# Altium PCB PCB1.PcbDoc
Units mil, origin at the board's own origin, x right, y up, seen from the top; angles counter-clockwise.
Board outline 4505.03 x 2170.03 mil, 2 copper layers (Top Layer, Bottom Layer); 21 components, 28 nets, 93 pads, 4 vias.
Unrouted connection lines stored in the file: 1.
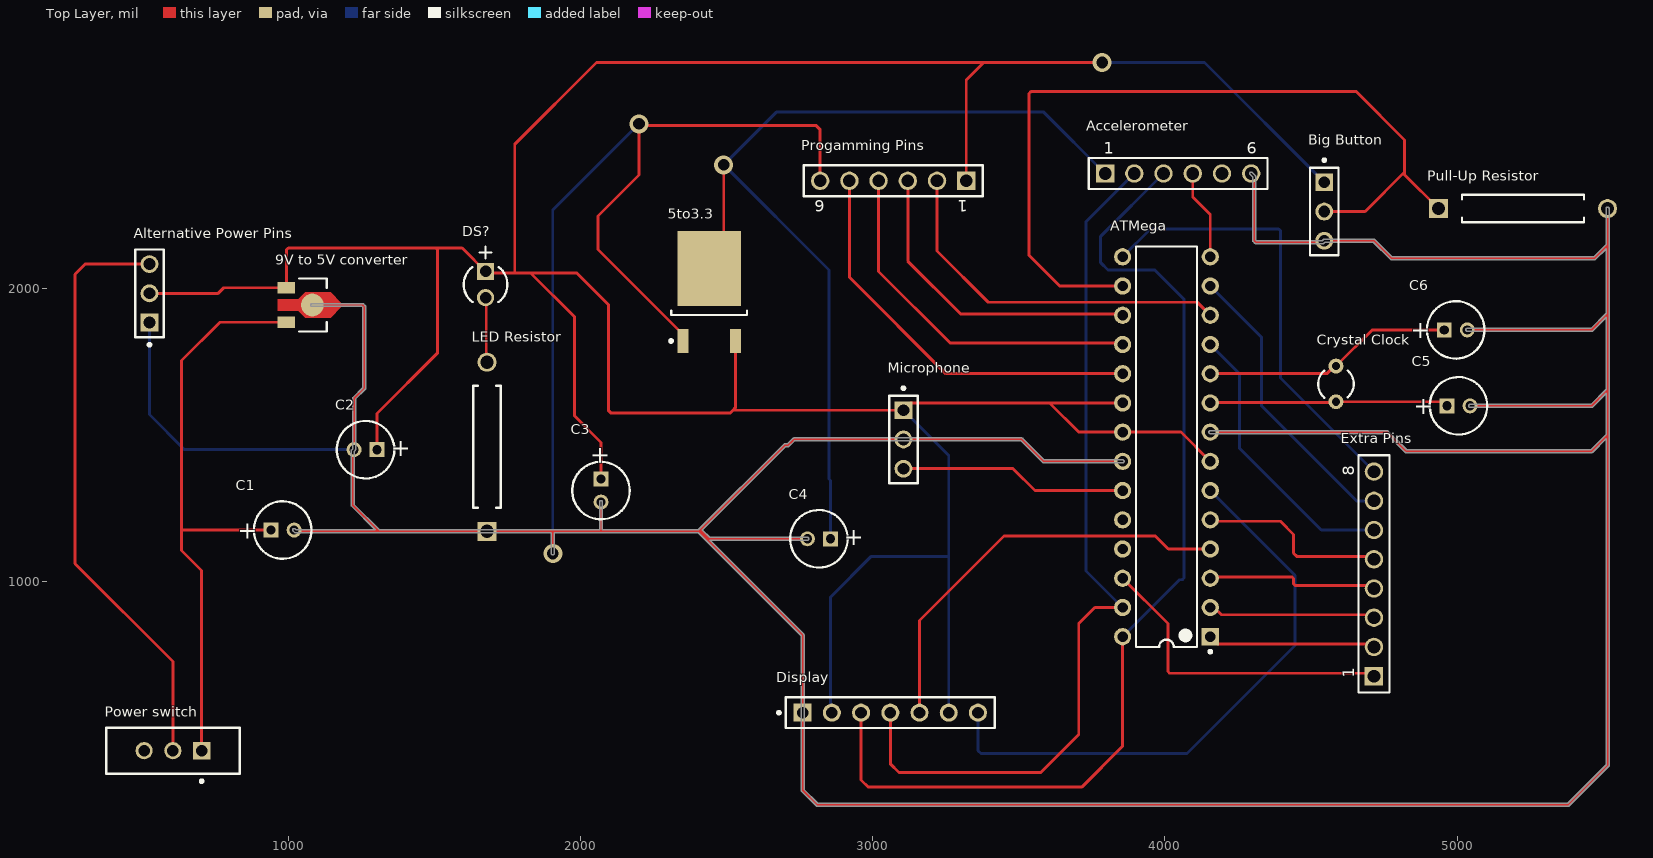
[diagram p0: Top Layer view]
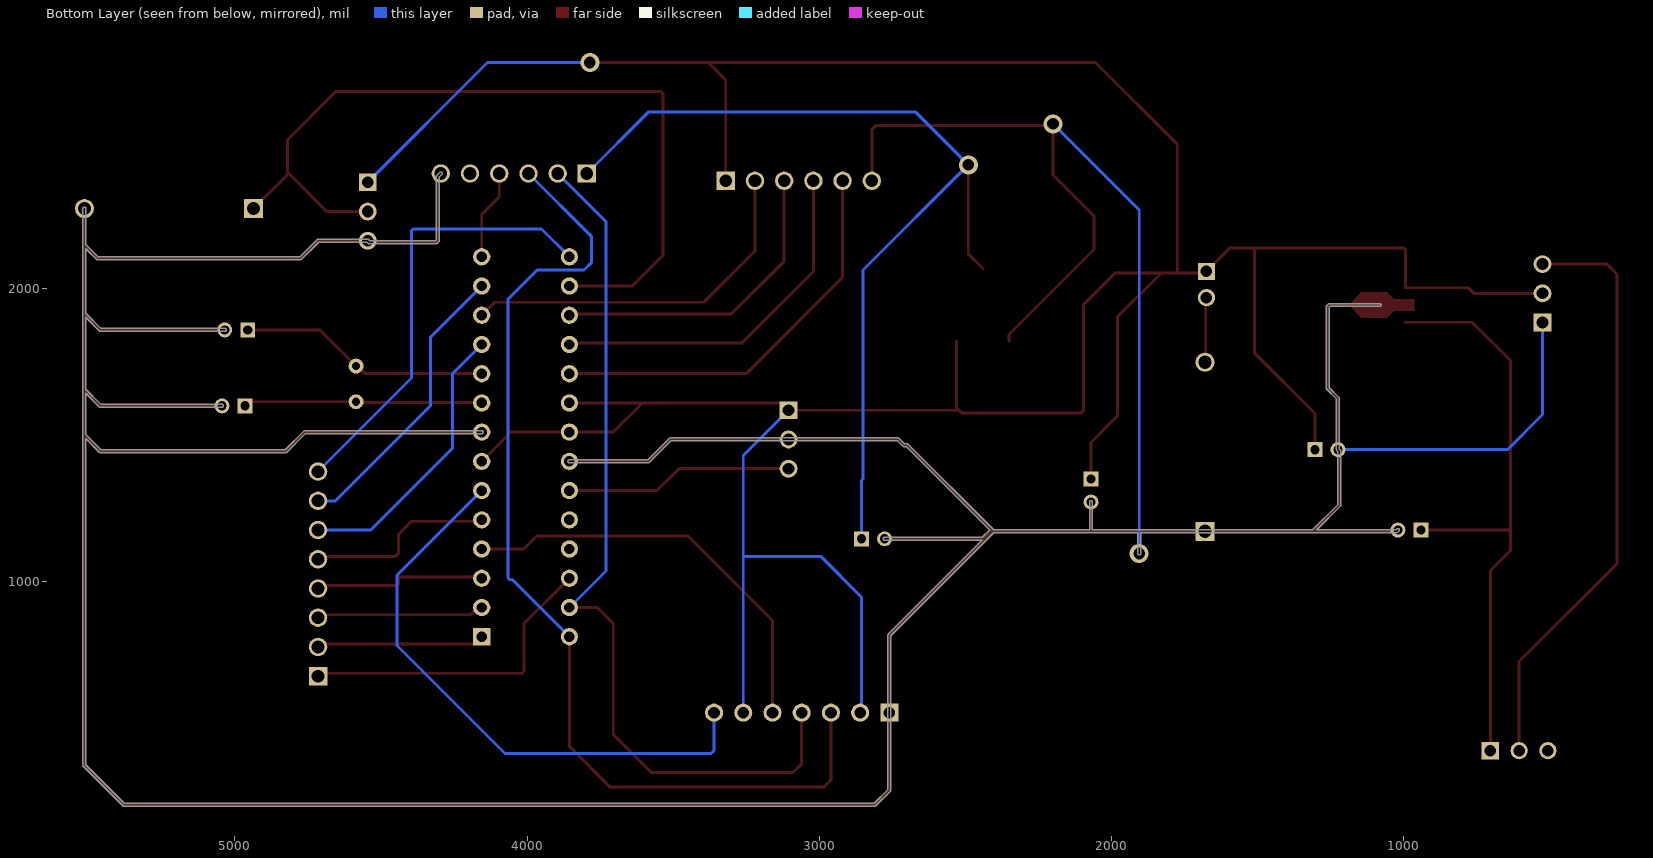
[diagram p1: Bottom Layer view, seen from below]

## Layer stack, top to bottom
Top Solder: solder mask 0.4, Solder Resist, Dk 3.5
Top Layer: signal copper 1.4
Dielectric 1: dielectric 12.6, FR-4, Dk 4.8
Bottom Layer: signal copper 1.4
Bottom Solder: solder mask 0.4, Solder Resist, Dk 3.5

## Board outline
1024.37,1165.61 1899.99,1165.61 1899.99,1095 ccw(c1905,1095) 1910.01,1095 1910.01,1165.61 2402.92,1165.61 2754.99,813.55 2754.99,285 ccw(c2760,285) 2756.47,281.44 2756.45,281.45 2806.45,231.45 2806.44,231.47 ccw(c2810,235) 2810,229.98 5380,229.98 ccw(c5380,235) 5383.56,231.47 5383.55,231.45 5518.55,366.45 5518.53,366.44 ccw(c5515,370) 5520.02,370 5520.02,2274.37 ccw(c5515,2274.37) 5518.53,2277.93 5518.55,2277.92 5517.92,2278.55 ccw(c5514.37,2275) 5509.98,2272.57 5509.98,2152.08 5467.92,2110.01 4777.08,2110.01 4718.55,2168.55 4718.56,2168.53 ccw(c4715,2165) 4715,2170.01 4545,2170.01 ccw(c4545,2165) 4541.44,2168.53 4541.45,2168.55 4537.92,2165.01 4312.94,2165.01 4310.02,2167.94 4310.02,2385 ccw(c4305,2385) 4308.53,2388.56 4308.55,2388.55 4298.55,2398.55 ccw(c4295,2395) 4291.45,2391.45 4299.98,2382.92 4299.98,2165.86 ccw(c4305,2165.86) 4301.47,2162.29 4301.45,2162.31 4307.31,2156.45 4307.29,2156.47 ccw(c4310.86,2160) 4310.86,2154.99 4540,2154.99 ccw(c4540,2160) 4543.56,2156.47 4543.55,2156.45 4547.08,2159.99 4712.92,2159.99 4771.45,2101.45 4771.44,2101.47 ccw(c4775,2105) 4775,2099.99 5470,2099.99 ccw(c5470,2105) 5473.56,2101.47 5473.55,2101.45 5509.98,2137.89 5509.98,1917.08 5457.92,1865.01 5034.37,1865.01 ccw(c5034.37,1860) 5034.37,1854.99 5460,1854.99 ccw(c5460,1860) 5463.56,1856.47 5463.55,1856.45 5509.98,1902.89 5509.98,1657.08 5457.92,1605.01 5043.74,1605.01 ccw(c5043.74,1600) 5043.74,1594.99 5460,1594.99 ccw(c5460,1600) 5463.56,1596.47 5463.55,1596.45 5509.98,1642.89 5509.98,1502.08 5457.92,1450.01 4827.08,1450.01 4763.55,1513.55 4763.56,1513.53 ccw(c4760,1510) 4760,1515.01 4155,1515.01 ccw(c4155,1510) 4155,1504.99 4757.92,1504.99 4821.45,1441.45 4821.44,1441.47 ccw(c4825,1445) 4825,1439.99 5460,1439.99 ccw(c5460,1445) 5463.56,1441.47 5463.55,1441.45 5509.98,1487.89 5509.98,372.08 5377.92,240.02 2812.08,240.02 2765.01,287.08 2765.01,815.63 ccw(c2760,815.63) 2763.53,819.19 2763.55,819.18 2442.74,1139.99 2776.26,1139.99 ccw(c2776.26,1145) 2781.28,1145 ccw(c2776.26,1145) 2776.26,1150.01 2442.08,1150.01 2416.78,1175.31 2701.45,1459.99 2710,1459.99 ccw(c2710,1465) 2713.56,1461.47 2713.55,1461.45 2732.08,1479.99 3507.92,1479.99 3581.45,1406.45 3581.44,1406.47 ccw(c3585,1410) 3585,1404.99 3855,1404.99 ccw(c3855,1410) 3860.02,1410 ccw(c3855,1410) 3855,1415.01 3587.08,1415.01 3513.55,1488.55 3513.56,1488.53 ccw(c3510,1485) 3510,1490.01 2730,1490.01 ccw(c2730,1485) 2726.44,1488.53 2726.45,1488.55 2707.92,1470.01 2699.37,1470.01 ccw(c2699.37,1465) 2695.81,1468.53 2695.82,1468.55 2402.92,1175.64 2075.01,1175.64 2075.01,1270.63 ccw(c2070,1270.63) 2064.99,1270.63 2064.99,1175.64 1312.01,1175.64 1225.01,1262.64 1225.01,1442.92 1228.55,1446.45 1228.53,1446.44 ccw(c1225,1450) 1230.01,1450 1230.01,1622.92 1263.55,1656.45 1263.53,1656.44 ccw(c1260,1660) 1265.01,1660 1265.01,1939.14 ccw(c1260,1939.14) 1263.53,1942.71 1263.55,1942.69 1257.69,1948.55 1257.71,1948.53 ccw(c1254.14,1945) 1254.14,1950.01 1082.27,1950.01 ccw(c1082.27,1945) 1082.27,1939.99 1252.06,1939.99 1254.99,1937.06 1254.99,1662.08 1221.45,1628.55 1221.47,1628.56 ccw(c1225,1625) 1219.99,1625 1219.99,1452.08 1216.45,1448.55 1216.47,1448.56 ccw(c1220,1445) 1214.99,1445 1214.99,1260.56 ccw(c1220,1260.56) 1216.47,1257 1216.45,1257.02 1297.83,1175.64 1026.45,1175.64 1023.55,1178.55 ccw(c1020,1175) 1016.45,1171.45 1020.82,1167.08 1020.81,1167.1 ccw(c1024.37,1170.63)

## Design rules (kind name [scope] priority, off if disabled: settings)
Clearance [All] p1: gap=10 ignorepadtopadclearanceinfootprint=FALSE except(0: Arc-Hole Track-Hole SMDPad-Hole THPad-Hole Via-Hole Fill-Hole Poly-Hole Region-Hole Text-Hole)
PolygonConnect [All] p1: connectstyle=Relief reliefconductorwidth=10 reliefentries=4 polygonreliefangle="90 Angle" airgapwidth=10
RoutingVias [All] p1: holewidth=28 width=50 viastyle="Through Hole" minholewidth=28 minwidth=50 maxholewidth=28 maxwidth=50
SolderMaskExpansion [All] p1: expansion=4 istentingtop=FALSE
Width [All] p1: maxlimit=10 minlimit=10 preferedwidth=10
30 further rules are at their usual default settings.

## Components (designator, comment, footprint, x,y, rotation, side; value= is the part's Value field where it differs from the comment)
5to3.3 "LD1117DT33TR" TO-252_N 2440,1989.29 r90 top
"9V to 5V converter" "UA78L05CPK" FP-PK0003A-MFG 1080,1945 r270 top
Accelerometer "61300611121" 61300611121 4045,2395 r0 top
"Alternative Power Pins" "22-28-4033" MOLX-22-28-4033_V 525,1985 r90 top
ATMega "ATMEGA328P-PU" ATML-28P3 4005,1460 r180 top
"Big Button" "22-28-4033" MOLX-22-28-4033_V 4545,2265 r270 top
C1 "ECA-1HHG010" CAPPR55-200-1100X500X1200 980.63,1175 r0 top value=330nF
C2 "ECA-1HHG010" CAPPR55-200-1100X500X1200 1264.37,1450 r180 top value=100nF
C3 "ECA-1HHG010" CAPPR55-200-1100X500X1200 2070,1310 r270 top value=100nF
C4 "ECA-1HHG010" CAPPR55-200-1100X500X1200 2815.63,1145 r180 top value=10µF
C5 "ECA-1HHG010" CAPPR55-200-1100X500X1200 5004.37,1600 r0 top value=10µF
C6 "ECA-1HHG010" CAPPR55-200-1100X500X1200 4995,1860 r0 top value=10µF
"Crystal Clock" "XTAL" R38 4585,1675 r0 top
Display "TSW-107-07-G-S" FP-TSW-107-07-G-S-MFG 3060,550 r0 top
DS? "304090040" LED-2P-2.28-3MM 1675,2015.12 r270 top
"Extra Pins" "61300811121" 61300811121 4715,1025 r90 top
"LED Resistor" "12FR050E" RESA86-1060X240 1680,1460 r90 top value=50m
Microphone "22-28-4033" MOLX-22-28-4033_V 3105,1485 r270 top
"Power switch" "EG1218" ESWI-EG1218_V 605,420 r180 top
"Progamming Pins" "61300611121" 61300611121 3070,2370 r180 top
"Pull-Up Resistor" "12FR050E" RESA86-1060X240 5225,2275 r0 top value=50m

## Footprints (in the part's own frame and the unit in brackets; to place one, negate y for a bottom-side part, rotate by r counter-clockwise, add the part's x,y. Pads: shape width x height; smd on the part's side, far side on the other; paste and mask are expansions set on the pad)
61300611121 [mm] "Pin Header, pitch 2.54 mm, THT, Vertical, single row, 6p"
  rect 1.6x1.6 hole 1.1: 1(-6.35,0)
  round 1.6 hole 1.1: 2(-3.81,0) 3(-1.27,0) 4(1.27,0) 5(3.81,0) 6(6.35,0)
  silkscreen extent -7.77,-1.35 7.77,1.35, body extent -7.62,-1.27 7.62,1.27, height 8.57
61300811121 [mm] "Pin Header, pitch 2.54 mm, THT, Vertical, single row, 8p"
  rect 1.6x1.6 hole 1.1: 1(-8.89,0)
  round 1.6 hole 1.1: 2(-6.35,0) 3(-3.81,0) 4(-1.27,0) 5(1.27,0) 6(3.81,0) 7(6.35,0) 8(8.89,0)
  silkscreen extent -10.31,-1.35 10.31,1.35, body extent -10.16,-1.27 10.16,1.27, height 8.57
ATML-28P3 [mm] "DIP, 28-Leads, Body 34.8x7.2mm, Pitch 2.54mm"
  rect 1.5x1.5 hole 0.9: 1(-3.81,16.51)
  round 1.5 hole 0.9: 2(-3.81,13.97) 3(-3.81,11.43) 4(-3.81,8.89) 5(-3.81,6.35) 6(-3.81,3.81) 7(-3.81,1.27) 8(-3.81,-1.27) 9(-3.81,-3.81) 10(-3.81,-6.35) 11(-3.81,-8.89) 12(-3.81,-11.43) 13(-3.81,-13.97) 14(-3.81,-16.51) 15(3.81,-16.51) 16(3.81,-13.97) 17(3.81,-11.43) 18(3.81,-8.89) 19(3.81,-6.35) 20(3.81,-3.81) 21(3.81,-1.27) 22(3.81,1.27) 23(3.81,3.81) 24(3.81,6.35) 25(3.81,8.89) 26(3.81,11.43) 27(3.81,13.97) 28(3.81,16.51)
  silkscreen extent -3.94,-17.4 2.65,17.93, body extent -3.95,-17.4 3.95,17.4, height 4.58
CAPPR55-200-1100X500X1200 [mm] "THD, 2-Leads, Dia 5mm, Pin Spacing 2mm"
  rect 1.3x1.3 hole 0.8: 1(-1,0)
  round 1.3 hole 0.8: 2(1,0)
  silkscreen extent -2.5,-2.5 2.5,2.5, body extent -2.5,-2.5 2.45,2.5, height 12
ESWI-EG1218_V [mm] "THD, 3-Leads, Body 11.6x4mm, Pitch 2.5mm"
  rect 1.5x1.5 hole 1: 1(-2.5,0)
  round 1.5 hole 1: 2(0,0) 3(2.5,0)
  silkscreen extent -5.8,-2 5.8,2.77, body extent -5.8,-2 5.8,2, height 7.4
FP-PK0003A-MFG [mm]
  rect 1x1.5 smd paste+0 mask+0: 1(-1.5,-2.203) 3(1.5,-2.203)
  round 1.98 smd paste+0 mask+0: 2(0,0.058)
  Top Layer region: 0,-2.953 -0.5,-2.953 -0.5,-1.152 -1.1,-0.553 -1.1,1.647 -0.2,2.548 0.2,2.548 1.1,1.647 1.1,-0.553 0.5,-1.152 0.5,-2.953
  silkscreen extent -2.3,-1.08 2.3,1.3, body extent -2.55,-3.05 2.55,2.65, height 0.25
FP-TSW-107-07-G-S-MFG [mm]
  rect 1.57x1.57 hole 1.02 paste-1000 mask+0: 1(-7.62,0)
  round 1.57 hole 1.02 paste-1000 mask+0: 2(-5.08,0) 3(-2.54,0) 4(0,0) 5(2.54,0) 6(5.08,0) 7(7.62,0)
  silkscreen extent -9.8,-1.34 9.08,1.34, body extent -9.18,-1.44 9.18,1.44, height 0.25
LED-2P-2.28-3MM [mm] "LED, 2-Leads, Dia 3mm, Pitch 2.28mm"
  rect 1.5x1.5 hole 1: 1(-1.14,0)
  round 1.5 hole 1: 2(1.14,0)
  silkscreen extent -3.29,-1.9 1.52,1.9, body extent -1.9,-1.91 1.52,1.91, height 5.3
MOLX-22-28-4033_V [mm] "THD, 3-Leads, Body 7.62x2.49mm, Pitch 2.54mm"
  rect 1.55x1.55 hole 1.02: 1(-2.54,0)
  round 1.55 hole 1.02: 2(0,0) 3(2.54,0)
  silkscreen extent -4.58,-1.24 3.81,1.24, body extent -3.81,-1.24 3.81,1.24, height 8.38
R38 [mm] "Crystal, Thru-Hole; 2 Leads; Body 3.1 x 8.2 mm (Dia.xH)"
  round 1.3 hole 0.7: 1(0,1.55) 2(0,-1.55)
  silkscreen extent -1.55,-1.19 1.55,1.17
RESA86-1060X240 [mm] "Axial Resistor, 2-Leads, Dia 2.4mm, Body Length 10.6mm"
  rect 1.65x1.65 hole 1.15: 1(-7.35,0)
  round 1.65 hole 1.15: 2(7.35,0)
  silkscreen extent -5.3,-1.2 5.3,1.2, body extent -7.76,-1.19 7.76,1.2, height 2.4
TO-252_N [mm] "D-PAK, 4-Leads, Body 6.1x6.5mm, Pitch 2.28mm, Lead Span 9.7mm, IPC Medium Density"
  rect 2.1x0.95 smd: 1(-4.25,2.28) 3(-4.25,-2.28)
  rect 6.5x5.5 smd: 4(2.05,0)
  silkscreen extent -4.37,-3.3 -1.6,3.43, body extent -2,-3.3 4.2,3.3, height 2.4

## Part data
5to3.3: library part CMP-0244-00088-1, "Fixed Low Drop Positive Voltage Regulator, 3.3V, 3-Pin DPAK, Tape and Reel", ComponentLink1Description="Manufacturer URL", ComponentLink1URL=http://www.st.com, ComponentLink2Description=Datasheet, ComponentLink2URL=http://www.st.com/internet/com/TECHNICAL_RESOURCES/TECHNICAL_LITERATURE/DATASHEET/CD00000544.pdf, DatasheetVersion=1/11/2011, PackageDescription="3-Pin Transistor Outline Package 2.28 mm Pitch, 9.7 mm Lead Span (DPAK)", PackageReference=TO-252, PackageVersion=2011
"9V to 5V converter": library part CMP-2000-07341-2, "IC REG LINEAR 5V 100MA SOT89-3", Dropout Voltage=1.7V, Manufacturer="Texas Instruments", Max Junction Temp=+125°C, Max Supply Voltage=20V, Min Supply Voltage=7V, Nominal Supply Current=3.8mA, Output Current=100mA, Output Voltage=5V, Package=PK0003A, Temperature="0°C to +125°C", Temperature Range Low=0°C, Accuracy Percentage=3.75%, Automotive=No, Category=IC, ComponentLink2Description=Datasheet, ComponentLink2URL=https://www.ti.com/lit/ds/symlink/ua78l.pdf, Device Class L1="Integrated Circuits (ICs)", Device Class L2="Power Management ICs", Device Class L3="Voltage Regulators - Linear", Digikey Description="IC REG LINEAR 5V 100MA SOT89-3", Height=1.6mm, Lead Free=Yes, Manufacturer Part Number=UA78L05CPK, Mouser Description="100-mA, 30-V VIN, Positive-Voltage Linear Regulators 3-SOT-89 0 to 125", Number Of Outputs=1, Octopart=https://octopart.com/ua78l05cpk-texas+instruments-525289, Output Type=Fixed, RoHS=TRUE, Temperature Range High=+125°C
Accelerometer "Progamming Pins": library part CMP-1502-01070-1, "THT Vertical Pin Header WR-PHD, Pitch 2.54 mm, Single Row, 6 pins", Contact Resistance=20mOhm, Manufacturer="Wurth Elektronik", Operating Temperature=-40to105degC, Rated Current=3A, Withstanding Voltage=500VAC, Working Voltage=250VAC, Datasheet URL=https://katalog.we-online.de/em/datasheet/6130xx11121.pdf, Gender=Male, Manufacturer URL=http://www.we-online.de, Mounting Technology=THT, Orientation=Vertical, Package Reference=61300611121, Packaging=Bag, Part Number=61300611121, Pin Number=6, Pitch=2.54mm, Publisher=WurthElektronik, Row Number=Single
"Alternative Power Pins" "Big Button" Microphone: library part CMP-1676-00001-5, "Male Header, Pitch 2.54 mm, 1 x 3 Position, Height 8.38 mm, Tail Length 3.18 mm, RoHS, Bulk", Colour=Black, Current Rating="4 A", Manufacturer=Molex, Max Operating Temperature="75 degC", Min Operating Temperature="0 degC", Package Quantity=1, Voltage Rating="250 V", ComponentLink1Description="Manufacturer URL", ComponentLink1URL=http://www.molex.com/, ComponentLink2Description=Datasheet, ComponentLink2URL=http://www.molex.com/pdm_docs/sd/022284033_sd.pdf, Contact Finish=Gold, Contact Material=Brass, Contact Plating=Gold, DatasheetVersion="Rev. G, 01/2012", Height="8.38 mm", Lead Pitch="0.1 inch", Length="7.62 mm", Mount="Through Hole", Mounting Technology="Through Hole", PackageDescription="Male Header, Pitch 2.54 mm, 1 x 3 Position, Height 8.38 mm, Tail Length 3.18 mm", PackageReference=22-28-4033, Packaging=Bulk, Pins=3, REACH SVHC=Unknown, RoHSCompliant=true, Rows=1
ATMega: library part CMP-020-00004-2, "8-Bit Microcontroller with 32 KBytes In-System Programmable Flash, 23 I/Os, -40 to 85 degC, 28-Pin PDIP (28P3), RoHS, Tube", Case/Package=DIP, Manufacturer=Atmel, Max Clock Frequency=20MHz, Max Operating Temperature=85°C, Max Supply Voltage=5.5V, Min Operating Temperature=-40°C, Min Supply Voltage=1.8V, Package Description="28-Pin Plastic Dual Inline Package, Body 34.671 x 7.3025 mm, Pitch 2.54 mm", Package Quantity=14, Package Reference=28P3, Package Version="Rev. B, 09/2001", Datasheet URL=http://www.atmel.com/images/Atmel-8271-8-bit-AVR-Microcontroller-ATmega48A-48PA-88A-88PA-168A-168PA-328-328P_datasheet_Complete.pdf, Datasheet Version="Rev. 8271J, 11/2015", Density=32KB, Ethernet Channels=0, I/Os=23, Interface=USART, Manufacturer URL=http://www.atmel.com/, Mounting Technology=TH, Package URL=http://www.atmel.com/images/Atmel-8271-8-bit-AVR-Microcontroller-ATmega48A-48PA-88A-88PA-168A-168PA-328-328P_datasheet_Complete.pdf, Packaging=Rail/Tube, Pins=28, RAM Size=2KB, RoHS Compliant=True
C1 C2 C3 C4 C5 C6: library part CMP-001-00024-5, "Aluminum Electrolytic Capacitor, 1 uF, +/- 20%, 50 V, -55 to 105 degC, 2-Pin THD, RoHS, Bulk", Capacitor Type=Electrolytic, Case/Package=Radial, Manufacturer=Panasonic, Max Operating Temperature=105°C, Min Operating Temperature=-55°C, Package Description="2-Pin Radial Lead, Dia 5 mm, Height 12 mm", Package Quantity=200, Package Reference=CAPPR55-200-1100X500X1200, Ripple Current=10mA, Tolerance=20%, Voltage Rating=50V, Datasheet URL=https://datasheet.ciiva.com/7275/94060-7275472.pdf, Datasheet Version=Mar-05, Diameter=5mm, Lead Pitch=2mm, Manufacturer URL=http://www.panasonic.com/, Mounting Technology=TH, Packaging=Bulk, Pins=2, Ripple Current (AC)=10mA, RoHS Compliant=True
"Crystal Clock": "Crystal Oscillator", LatestRevisionDate=17-Jul-2002, LatestRevisionNote="Re-released for DXP Platform.", PackageDescription="Crystal, Thru-Hole; 2 Leads; Body 3.1 x 8.2 mm (Dia.xH)", PackageReference=R38, Published=8-Jun-2000, Publisher="Altium Limited"
Display: library part CMP-02766-000065-1, "CONN HEADER VERT 7POS 2.54MM", Manufacturer=SAMTEC, Package=0, Temperature="-55°C to +125°C", Temperature Range High=+125°C, Temperature Range Low=-55°C, Automotive=No, Category=Conn, ComponentLink2Description=Datasheet, ComponentLink2URL=http://suddendocs.samtec.com/prints/tsw-xxx-xx-xxx-x-xx-xxx-mkt.pdf, Conn Gender=Male, Conn Orientation=Straight, Contact Material=Gold,Nickel, Device Class L1=Connectors, Device Class L2="Headers and Wire Housings", Device Class L3=unset, Digikey Description="CONN HEADER VERT 7POS 2.54MM", Footprint Url=http://suddendocs.samtec.com/prints/tsw-xxx-xx-x-x-xx-xxx-footprint.pdf, Height=8.71mm, Lead Free=Yes, Manufacturer Part Number=TSW-107-07-G-S, Mouser Description="Conn Unshrouded Header HDR 7 POS 2.54mm Solder ST Thru-Hole Automotive Bulk", Number Of Contacts=7, Number Of Rows=1, Octopart=https://octopart.com/tsw-107-07-g-s-samtec-272202, Pitch=2.54mm, RoHS=TRUE
DS?: library part CMP-007-00006-1, "Green LED, 80 mW, 20 mA, -25 to 85 degC, 2-Pin THD", Manufacturer="Shenzhen CGX", Package Description="2-Pin Through Hole Device, Dia 3 mm, Pitch 2.28 mm", Case/Package=304090040, Datasheet URL=http://datasheet.octopart.com/304090040-Chengguangxing-datasheet-62330655.pdf, Datasheet Version="Rev. 1.0, 09/2014", Manufacturer URL=http://szcgx.com/, Mounting Technology=TH, Package Reference=304090040, RoHS Compliant=Unknown
"Extra Pins": library part CMP-1502-01076-1, "THT Vertical Pin Header WR-PHD, Pitch 2.54 mm, Single Row, 8 pins", Contact Resistance=20mOhm, Manufacturer="Wurth Elektronik", Operating Temperature=-40to105degC, Rated Current=3A, Withstanding Voltage=500VAC, Working Voltage=250VAC, Datasheet URL=https://katalog.we-online.de/em/datasheet/6130xx11121.pdf, Gender=Male, Manufacturer URL=http://www.we-online.de, Mounting Technology=THT, Orientation=Vertical, Package Reference=61300811121, Packaging=Bag, Part Number=61300811121, Pin Number=8, Pitch=2.54mm, Publisher=WurthElektronik, Row Number=Single
"LED Resistor" "Pull-Up Resistor": library part CMP-009-00035-3, "Axial Resistor, 50 mOhm, +/- 1%, 2 W, -55 to 275 degC, 2-Pin THD, RoHS, Bulk", Case/Package=Axial, Manufacturer=Ohmite, Max Operating Temperature=275°C, Min Operating Temperature=-55°C, Package Description="2-Pin Axial Lead, Dia 2.4 mm, Body Length 10.6 mm", Package Quantity=10, Power=2W, Tolerance=1%, Voltage Rating=100mV, Composition=Wirewound, Datasheet URL=http://www.ohmite.com/cat/res_10.pdf, Datasheet Version=Jun-15, Diameter=2.4mm, Manufacturer URL=http://www.ohmite.com/, Mounting Technology=TH, Package Reference=12FR050E, Packaging=Bulk, Pins=2, RoHS Compliant=True
"Power switch": library part CMP-1696-00002-1, "Slide Switch, 500 V, -20 to 70 degC, 3-Pin THD, RoHS", Case\Package=SOT-23-5, Dropout Voltage="300 mV", Max Input Voltage="8 V", Max Operating Temperature="85 degC", Max Ouput Current="150 mA", Max Power Dissipation="250 mW", Min Input Voltage="4.3 V", Min Operating Temperature="-40 degC", Nominal Output Voltage="3.3 V", Package Quantity=3000, ComponentLink1Description="Manufacturer URL", ComponentLink1URL=http://www.e-switch.ch/en/, ComponentLink2Description=Datasheet, ComponentLink2URL=https://www.e-switch.com/system/asset/product_line/data_sheet/119/EG.pdf, DatasheetVersion=Oct-15, Height="1.3 mm", Length="3 mm", Mount="Surface Mount", Output Current="150 mA", Output Voltage="3.3 V", Outputs=1, PackageDescription="3-Pin Through Hole Device, Body 11.6 x 4 mm, Pitch 2.5 mm", PackageReference=EG1218, Packaging="Tape and Reel", Pins=5, Power Rating="250 mW", Radiation Hardening=No, REACH SVHC="No SVHC", RoHSCompliant=true, Width="1.8 mm"

## Via types
v1: diameter 65, hole 40, Top Layer to Bottom Layer, 4 vias

## Nets (pads, with @x,y where several pads share a name; then routed paths per layer and width w, separated by ;. In a path a pad name is that pad's centre, name@x,y a point inside that pad or via, vN(x,y) a via of type N, cw(c..) or ccw(c..) an arc to the next point about the centre after c; other vN are vias at no path point)
"3.3 Volt VDD": 5to3.3.4 Accelerometer.1 C4.1 | length 3273.4
  Top Layer w10: 5to3.3.4 2490,2120 v1(2490,2425)
  Bottom Layer w10: C4.1 2855,1345 2850,1350 2850,2065 v1(2490,2425) 2670,2605 3585,2605 Accelerometer.1
"5 Volt VDD": 5to3.3.3 "9V to 5V converter.1" "Alternative Power Pins.2" "Big Button.1" "Progamming Pins.1" ATMega.7 ATMega.20 ATMega.21 C2.1 C3.1 Display.2 Display.6 DS?.1 Microphone.1 | length 12271.6
  Top Layer w10: 525,1985 760,1985 779.06,2004.06 993.29,2004.06 993.29,2133.29 1000,2140 1505,2140 ; C2.1 1303.74,1573.74 1510,1780 1510,2135 1505,2140 ; C3.1 2070,1475 1980,1565 1980,1904.14 1829.14,2055 ; 5to3.3.3 2529.76,1593.25 2521.51,1585 ; 3320,2370 3320,2715 3380,2775 ; v1(3785,2775) 3380,2775 ; ATMega.20 3605,1610 ; ATMega.7 4055,1510 ATMega.21 3705,1510 3605,1610 ; 1505,2140 1595,2140 1680,2055 1775,2055 ; 1775,2055 1829.14,2055 ; 1775,2055 1775,2495 2055,2775 3380,2775 ; 1829.14,2055 1987.07,2055 2095,1947.07 2095,1585 2105,1575 2511.51,1575 2521.51,1585 ; 2521.51,1585 Microphone.1 3130,1610 3605,1610
  Bottom Layer w10: Display.2 2855,555 2855,945 2995,1085 3260,1085 ; Microphone.1 3260,1430 3260,1085 ; Display.6 3260,1085 ; v1(3785,2775) 4135,2775 4545,2365
GND: 5to3.3.1 "9V to 5V converter.2" "Alternative Power Pins.1" "Big Button.3" "LED Resistor.1" "Progamming Pins.6" "Pull-Up Resistor.2" Accelerometer.6 ATMega.8 ATMega.22 C1.2 C2.2 C3.2 C4.2 C5.2 C6.2 Display.1 Microphone.2 | length 18604.8
  Top Layer w10: C1.2 1024.37,1170.63 1309.93,1170.63 ; 1082.27,1945 1254.14,1945 1260,1939.14 1260,1660 1225,1625 C2.2 1220,1445 1220,1260.56 1309.93,1170.63 ; v1(1905,1095) 1905,1170.63 ; C3.2 2070,1170.63 ; 5to3.3.1 2350.24,1844.61 2060,2134.84 2060,2250 2200,2390 v1(2200,2565) 2205,2560 2805,2560 2820,2545 2820,2370 ; C4.2 2440,1145 2409.68,1175.31 ; ATMega.22 3585,1410 3510,1485 Microphone.2 2730,1485 2710,1465 2699.37,1465 2409.68,1175.31 ; ATMega.8 4760,1510 4825,1445 5460,1445 5515,1500 ; Accelerometer.6 4305,2385 4305,2165.86 4310.86,2160 4540,2160 4545,2165 4715,2165 4775,2105 5470,2105 5515,2150 ; C6.2 5460,1860 5515,1915 ; C5.2 5460,1600 5515,1655 ; 5514.37,2275 5515,2274.37 5515,2150 ; 1309.93,1170.63 1680,1170.63 1905,1170.63 ; 1905,1170.63 2070,1170.63 ; 2070,1170.63 2405,1170.63 ; 2405,1170.63 2760,815.63 Display.1 2760,285 2810,235 5380,235 5515,370 5515,1500 ; 2405,1170.63 2409.68,1175.31 ; 5515,1500 5515,1655 ; 5515,1655 5515,1915 ; 5515,1915 5515,2150
  Bottom Layer w10: 525,1885 525,1570 645,1450 C2.2 ; v1(1905,1095) 1905,2270 v1(2200,2565)
"Net9V Battery_P": "Alternative Power Pins.3" "Power switch.2" | length 2045.3
  Top Layer w10: 525,2085 305,2085 270,2050 270,1060 605,725 605,420
  Bottom Layer w10: 520,2090 525,2085
"Net9V to 5V converter_3": "9V to 5V converter.3" "Power switch.1" C1.1 | length 2084.2
  Top Layer w10: 703.43,420 703.43,1036.57 635,1105 635,1180 ; C1.1 640,1175 635,1180 ; 993.29,1885.94 765.94,1885.94 635,1755 635,1180
NetATMega_26: "Extra Pins.1" ATMega.26 | length 1070.8
  Top Layer w10: ATMega.26 4010,855 4010,690.86 4015.86,685 4695,685
NetDS?_2: "LED Resistor.2" DS?.2 | length 222.9
  Top Layer w10: DS?.2 1677.5,1967.74 1677.5,1751.87 1680,1749.37
PB0: Accelerometer.4 ATMega.14 | length 309.9
  Top Layer w10: Accelerometer.4 4095,2315 4155,2255 ATMega.14
PB1: "Extra Pins.8" ATMega.15 | length 1538.5
  Bottom Layer w10: ATMega.15 3950,2205 4389.14,2205 4395,2199.14 4395,1695 4715,1375
PB2: "Big Button.2" "Pull-Up Resistor.1" ATMega.16 | length 2882.2
  Top Layer w10: ATMega.16 3640,2010 3535,2115 3535,2669.14 3540.86,2675 4655,2675 4820,2510 4820,2400 ; 4550,2265 4685,2265 4820,2400 ; 4935.63,2275 4820,2390.63 4820,2400
PB3: "Progamming Pins.3" ATMega.17 | length 1086.6
  Top Layer w10: 3120,2370 3120,2095 3300,1915 3850,1915 ATMega.17
PB4: "Progamming Pins.4" ATMega.18 | length 1248.6
  Top Layer w10: 3020,2370 3020,2060 3265,1815 3850,1815 ATMega.18
PB5: "Progamming Pins.5" ATMega.19 | length 1401.7
  Top Layer w10: 2920,2370 2920,2040 3250,1710 ATMega.19
PC0: ATMega.23 Microphone.3 | length 781.1
  Top Layer w10: Microphone.3 3480,1385 3555,1310 ATMega.23
PC1: ATMega.24
PC2: ATMega.25
PC4: Accelerometer.2 ATMega.27 Display.4 | length 3044.2
  Top Layer w10: Display.4 3060,375 3090,345 3575,345 3705,475 3705,855 3760,910 ATMega.27
  Bottom Layer w10: ATMega.27 3730,1035 3730,2230 Accelerometer.2
PC5: Accelerometer.3 ATMega.28 Display.3 | length 3546.5
  Top Layer w10: Display.3 2960,320 2985,295 3715,295 3855,435 ATMega.28
  Bottom Layer w10: ATMega.28 4050,1005 4059.14,1005 4065,1010.86 4065,1965 3965,2065 3805,2065 3780,2090 3780,2180 Accelerometer.3
PC6: "Extra Pins.2" "Progamming Pins.2" ATMega.1 ATMega.12 | length 1816.5
  Top Layer w10: 3220,2370 3220,2130 3395.47,1954.53 4110.47,1954.53 ATMega.12 ; ATMega.1 4179.53,785.47 4184.91,785.47 4185.39,785 4695,785
PD0: "Extra Pins.3" ATMega.2 | length 550.4
  Top Layer w10: ATMega.2 4167.97,910 4192.97,885 4695,885
PD1: "Extra Pins.4" ATMega.3 | length 565.2
  Top Layer w10: ATMega.3 4160,1015 4434.14,1015 4440,1009.14 4440,990.86 4445.86,985 4695,985
PD2: ATMega.4 Display.5 | length 1448.4
  Top Layer w10: Display.5 3160,865 3449.53,1154.53 3966.88,1154.53 4011.4,1110 ATMega.4
PD3: "Extra Pins.5" ATMega.5 | length 629.4
  Top Layer w10: ATMega.5 4160,1205 4395,1205 4440,1160 4440,1095.86 4450.86,1085 4695,1085
PD4: ATMega.6 Display.7 | length 2022.5
  Bottom Layer w10: Display.7 3360,420 3370,410 4075,410 4445,780 4445,1020 ATMega.6
PD5: "Extra Pins.6" ATMega.11 | length 972.4
  Bottom Layer w10: ATMega.11 4255,1710 4255,1455 4535,1175 4715,1175
PD7: "Extra Pins.7" ATMega.13 | length 1002.1
  Bottom Layer w10: ATMega.13 4330,1835 4330,1600 4655,1275 4715,1275
XTAL1: "Crystal Clock.2" ATMega.9 C5.1 | length 817.4
  Top Layer w10: ATMega.9 4156.99,1611.99 4583.01,1611.99 4585,1613.98 4951.02,1613.98 C5.1
XTAL2: "Crystal Clock.1" ATMega.10 C6.1 | length 862.8
  Top Layer w10: ATMega.10 4553.62,1710 4579.64,1736.02 4585,1736.02 4708.98,1860 C6.1
pads on no net: "Power switch.3" Accelerometer.5

## Text inside footprints (layer, text, board x,y; h text height)
Accelerometer: Top Overlay "1" at 3790.28,2461.93 h40; Top Overlay "6" at 4280.04,2461.93 h40
C1: Top Overlay "+" at 826.77,1145.98 h59.06
C2: Top Overlay "+" at 1418.23,1479.02 h59.06 r180
C3: Top Overlay "+" at 2040.98,1463.86 h59.06 r270
C4: Top Overlay "+" at 2969.49,1174.02 h59.06 r180
C5: Top Overlay "+" at 4850.51,1570.98 h59.06
C6: Top Overlay "+" at 4841.14,1830.98 h59.06
"Extra Pins": Top Overlay "8" at 4648.07,1360.04 h40 r90; Top Overlay "1" at 4648.07,670.28 h40 r90
"Progamming Pins": Top Overlay "1" at 3324.72,2303.07 h40 r180; Top Overlay "6" at 2834.96,2303.07 h40 r180